# Altium PCB Level Shifter V1.0.PcbDoc
Units mm, origin at the board's own origin, x right, y up, seen from the top; angles counter-clockwise.
Board outline 27 x 20.7 mm, 2 copper layers (Top Layer, Bottom Layer); 9 components, 9 nets, 47 pads, 0 vias.
Unrouted connection lines stored in the file: 1.
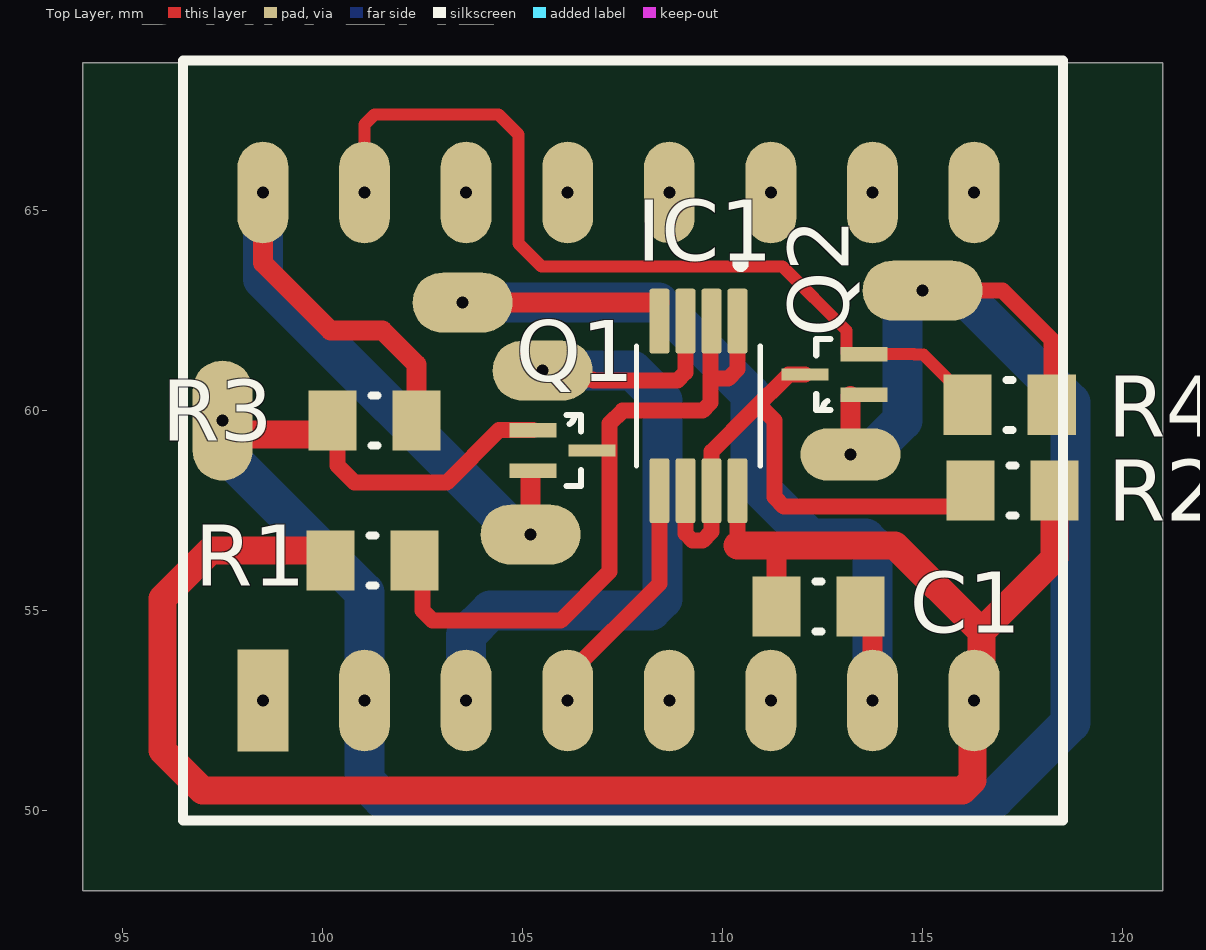
[diagram p0: Top Layer view]
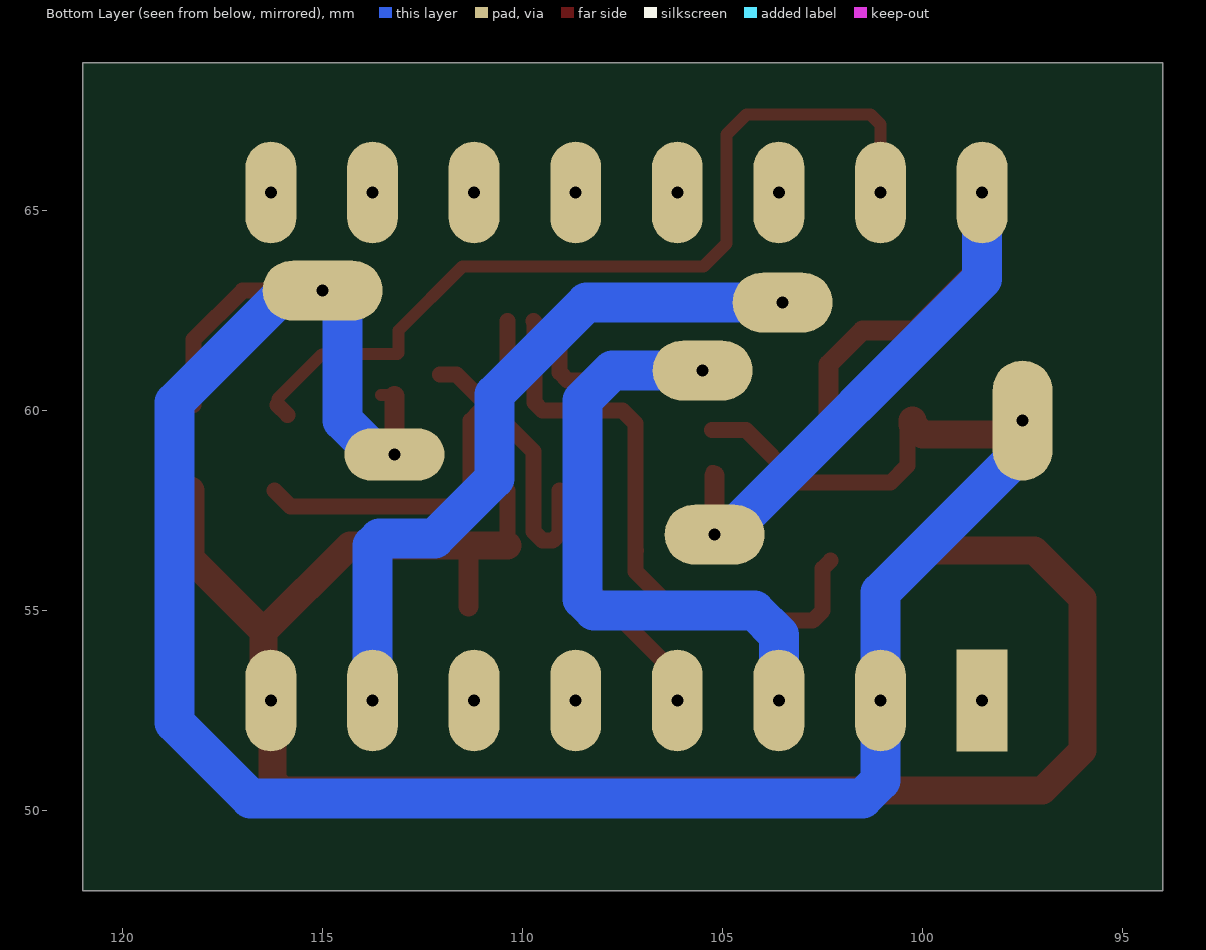
[diagram p1: Bottom Layer view, seen from below]
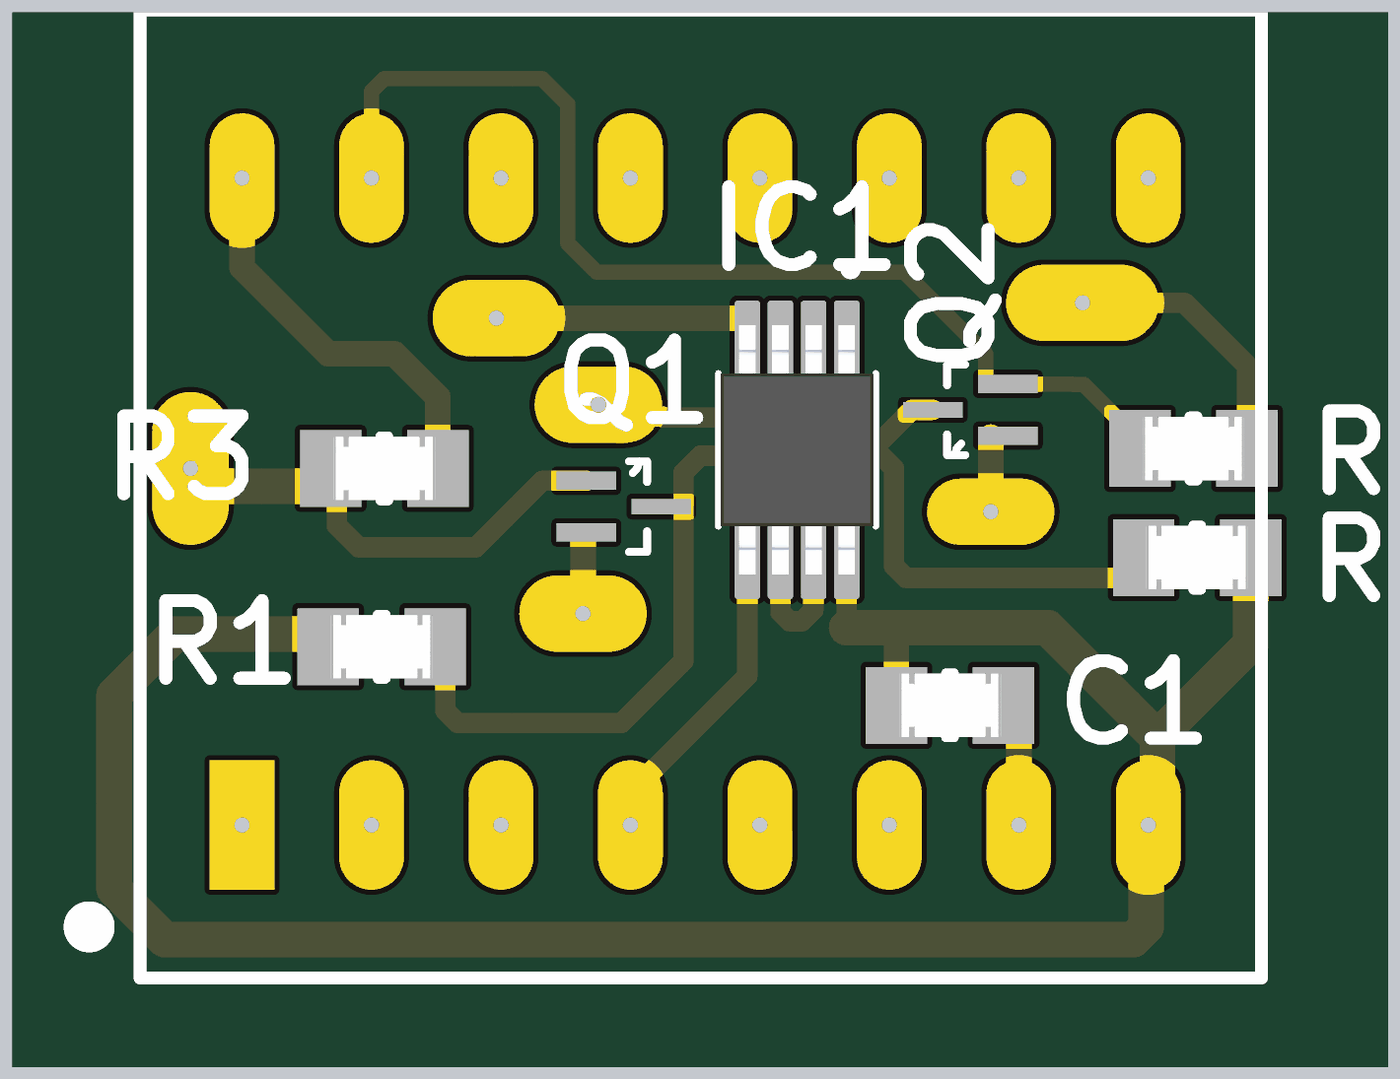
[diagram p2: 3D render of the assembled board from above, using the file's embedded part models]

## Layer stack, top to bottom
Top Solder: solder mask 0.0102, Solder Resist, Dk 3.5
Top Layer: signal copper 0.0356
Dielectric 1: dielectric 0.32, FR-4, Dk 4.8
Bottom Layer: signal copper 0.0356
Bottom Solder: solder mask 0.0102, Solder Resist, Dk 3.5

## Board outline
94,48 121,48 121,68.7 94,68.7

## Design rules (kind name [scope] priority, off if disabled: settings)
Clearance [All] p1: gap=0.254 ignorepadtopadclearanceinfootprint=FALSE except(0: Arc-Hole Track-Hole SMDPad-Hole THPad-Hole Via-Hole Fill-Hole Poly-Hole Region-Hole Text-Hole; 0.127: Arc-Arc Arc-Track Arc-SMDPad Track-Track Track-SMDPad SMDPad-SMDPad SMDPad-THPad)
PolygonConnect [All] p1: connectstyle=Relief reliefconductorwidth=0.254 reliefentries=4 polygonreliefangle="90 Angle" airgapwidth=0.254
RoutingVias [All] p1: holewidth=0.711 width=1.27 viastyle="Through Hole" minholewidth=0.711 minwidth=1.27 maxholewidth=0.711 maxwidth=1.27
SolderMaskExpansion [All] p1: expansion=0.102 istentingtop=FALSE
Width [All] p1: maxlimit=10 minlimit=0.254 preferedwidth=0.3 minimp=50.000000 maximp=50.000000 favimp=50.000000
30 further rules are at their usual default settings.

## Components (designator, comment, footprint, x,y, rotation, side; value= is the part's Value field where it differs from the comment)
C1 "*" "0805 Resistor - IPC A" 112.4,55.1 r180 top
DRIVER1 "TMC2209" TMC2209 98.51,52.75 r90 top
IC1 "AD8542" IC_AD8542ARMZ_Analog_Devices 109.399,60.115 r270 top
Q1 "PMR280UN" MOSFET_PMR280UN_NEXPERIA 106,59 r0 top
Q2 "PMR280UN" MOSFET_PMR280UN_NEXPERIA 112.8,60.9 r180 top
R1 "10k" "0805 Resistor - IPC A" 101.25,56.25 r180 top
R2 "10k" "0805 Resistor - IPC A" 117.25,58 r0 top
R3 "10k" "0805 Resistor - IPC A" 101.301,59.75 r180 top
R4 "10k" "0805 Resistor - IPC A" 117.177,60.142 r0 top

## Footprints (in the part's own frame and the unit in brackets; to place one, negate y for a bottom-side part, rotate by r counter-clockwise, add the part's x,y. Pads: shape width x height; smd on the part's side, far side on the other; paste and mask are expansions set on the pad)
"0805 Resistor - IPC A" [mil]
  rect 47.5x59.38 smd paste+0: 1(-41.37,0) 2(41.37,0)
  silkscreen extent -3,-25 3,25, body extent -85,-49 85,49, height 10
IC_AD8542ARMZ_Analog_Devices [mm]
  rrect25% 1.62x0.5 smd: 1(-2.12,0.975) 2(-2.12,0.325) 3(-2.12,-0.325) 4(-2.12,-0.975) 5(2.12,-0.975) 6(2.12,-0.325) 7(2.12,0.325) 8(2.12,0.975)
  silkscreen extent -3.65,-1.55 1.5,1.55, body extent -2.45,-1.5 2.45,1.5, height 1.1
MOSFET_PMR280UN_NEXPERIA [mil] "N-channel mTrenchMOS ultra low level FET"
  rect 46x14 smd: 1(-29,20) 2(-29,-20)
  rect 46x12 smd: 3(29,0)
  silkscreen extent 4,-35 18,35
TMC2209 [mm]
  rect 2.54x1.27 hole 0.3: 1(0,0)
  oval 2.54x1.27 hole 0.3: 2(0,-2.54) 3(0,-5.08) 4(0,-7.62) 5(0,-10.16) 6(0,-12.7) 7(0,-15.24) 8(0,-17.78) 9(12.7,-17.78) 10(12.7,-15.24) 11(12.7,-12.7) 12(12.7,-10.16) 13(12.7,-7.62) 14(12.7,-5.08) 15(12.7,-2.54) 16(12.7,0)
  round 1 on Top Overlay: ""(-2,3)
  silkscreen extent -3,-20 16,2

## Part data
C1: library part CAP_0805_generic
DRIVER1: "TMC2209 FET based stepper motor driver board"
IC1: library part IC_AD8542_ANALOG, "Operational Amplifiers - Op Amps DUAL, LOW PWR RAIL/RAIL OP AMP / AD8542ARZ / SOIC-8"
Q1 Q2: library part MOSFET_PMR280UN_NEXPERIA
R1 R2 R3 R4: library part RES_0805_generic

## Free pads (board coordinates)
  oval 2.5x1.3 hole 0.3: 68(113.2,58.9)
  oval 3x1.5 hole 0.3: 68(115,63)
  oval 1.5x3 hole 0.3: 69(97.5,59.75)
  oval 2.5x1.5 hole 0.3: 70(103.5,62.7) 70(105.2,56.9) 70(105.5,61)

## Nets (pads, with @x,y where several pads share a name; then routed paths per layer and width w, separated by ;. In a path a pad name is that pad's centre, name@x,y a point inside that pad or via, vN(x,y) a via of type N, cw(c..) or ccw(c..) an arc to the next point about the centre after c; other vN are vias at no path point)
+3V3: DRIVER1.2 pad.68 pad.69 Q1.1 Q2.1 R3.2 R4.2 | length 64.1
  Top Layer w0.3: Q2.1@113.2,60.364 113.228,60.392 Q2.1
  Top Layer w0.4: R3.2 100.37,59.63 100.37,58.63 100.8,58.2 103.1,58.2 104.408,59.508 Q1.1 ; pad.68@115,63 117,63 118.228,61.772 R4.2
  Top Layer w0.5: pad.68@113.2,58.9 Q2.1@113.2,60.364
  Top Layer w0.7: pad.69 97.85,59.4 99.997,59.4 100.25,59.653 R3.2
  Bottom Layer w1: pad.69 97.5,59 101.05,55.45 DRIVER1.2 101.05,50.75 101.5,50.3 116.8,50.3 118.7,52.2 118.7,60.2 115.9,63 115,63 114.5,62.5 114.5,59.756 113.644,58.9 pad.68@113.2,58.9
+5V: C1.2 DRIVER1.8 IC1.8 R1.2 R2.2 | length 47.4
  Top Layer w0.3: 111.3,56.626 111.349,56.577
  Top Layer w0.4: 110.374,56.626 IC1.8
  Top Layer w0.5: C1.2 111.349,56.577
  Top Layer w0.7: R1.2 99.949,56.5 97.2,56.5 96,55.3 96,51.5 97,50.5 116,50.5 116.25,50.75 116.25,52.71 DRIVER1.8 116.47,52.93 116.47,54.47 ; 110.374,56.626 111.3,56.626 114.314,56.626 116.47,54.47 ; R2.2 118.301,56.301 116.47,54.47
GND: C1.1 DRIVER1.1 DRIVER1.7 IC1.4 pad.70@103.5,62.7 | length 25.3
  Top Layer w0.3: C1.1 C1.1@113.75,54.801
  Top Layer w0.5: pad.70@103.5,62.7 IC1.4@108.424,62.7 ; DRIVER1.7 C1.1@113.75,54.801
  Bottom Layer w1: pad.70@103.5,62.7 108.4,62.7 110.7,60.4 110.7,58.3 112.2,56.8 113.574,56.8 113.75,56.624 DRIVER1.7
NetDRIVER1_3: DRIVER1.3 IC1.3 pad.70@105.5,61 | length 20.2
  Top Layer w0.4: pad.70@105.5,61 105.73,60.77 106.755,60.77 106.776,60.75 108.872,60.75 109.074,60.953 IC1.3
  Bottom Layer w1: DRIVER1.3 103.59,54.39 104.2,55 108.207,55 108.5,55.293 108.5,60.255 107.755,61 pad.70@105.5,61
NetDRIVER1_4: DRIVER1.4 IC1.5 | length 6.2
  Top Layer w0.4: DRIVER1.4 106.13,53.38 108.424,55.674 IC1.5
NetDRIVER1_15: DRIVER1.15 Q2.2 R4.1 | length 22.3
  Top Layer w0.3: DRIVER1.15 101.05,67.15 101.3,67.4 104.4,67.4 104.9,66.9 104.9,64.176 105.476,63.6 111.5,63.6 113.102,61.998 113.102,61.436 113.13,61.408 Q2.2 114.792,61.408 114.8,61.4 115.019,61.4 116.126,60.293 R4.1
  Top Layer w0.4: R4.1@115.872,59.888 R4.1
NetDRIVER1_16: DRIVER1.16 pad.70@105.2,56.9 Q1.2 R3.1 | length 21.1
  Top Layer w0.3: Q1.2@105.228,58.4 105.228,58.492 Q1.2
  Top Layer w0.5: DRIVER1.16 98.51,63.69 100.2,62 101.5,62 102.352,61.148 R3.1 ; pad.70@105.2,56.9 Q1.2@105.2,58.372
  Bottom Layer w1: DRIVER1.16 98.51,63.29 104.9,56.9 pad.70@105.2,56.9
NetIC1_1: IC1.1 IC1.2 Q1.3 R1.1 | length 17.1
  Top Layer w0.4: R1.1 102.5,56.051 102.5,55 102.75,54.75 105.95,54.75 107.171,55.971 107.171,56.498 107.168,56.5 107.171,56.502 107.171,59.671 107.5,60 109.5,60 109.7,60.2 109.7,60.8 ; IC1.2 109.7,62.211 109.7,60.8 ; IC1.1 110.374,61.034 110.14,60.8 109.7,60.8
NetIC1_6: IC1.6 IC1.7 Q2.3 R2.1 | length 14.4
  Top Layer w0.3: 110.734,59.984 110.734,60.003
  Top Layer w0.4: IC1.6 109.074,56.926 109.25,56.75 109.5,56.75 109.72,56.97 IC1.7@109.72,57.995 ; IC1.7 109.724,58.974 110.734,59.984 111.65,60.9 Q2.3 ; 111.066,59.984 111.3,59.75 111.3,57.834 111.534,57.6 115.799,57.6 R2.1
pads on no net: DRIVER1. DRIVER1.5 DRIVER1.6 DRIVER1.9 DRIVER1.10 DRIVER1.11 DRIVER1.12 DRIVER1.13 DRIVER1.14